# Altium PCB AS800-Temp V1.1.PcbDoc (part 1 of 3)
Units mil, origin at the board's own origin, x right, y up, seen from the top; angles counter-clockwise.
Board outline 4813.18 x 5128.14 mil, 2 copper layers (Top Layer, Bottom Layer); 246 components, 215 nets, 915 pads, 639 vias.
Unrouted connection lines stored in the file: 2.
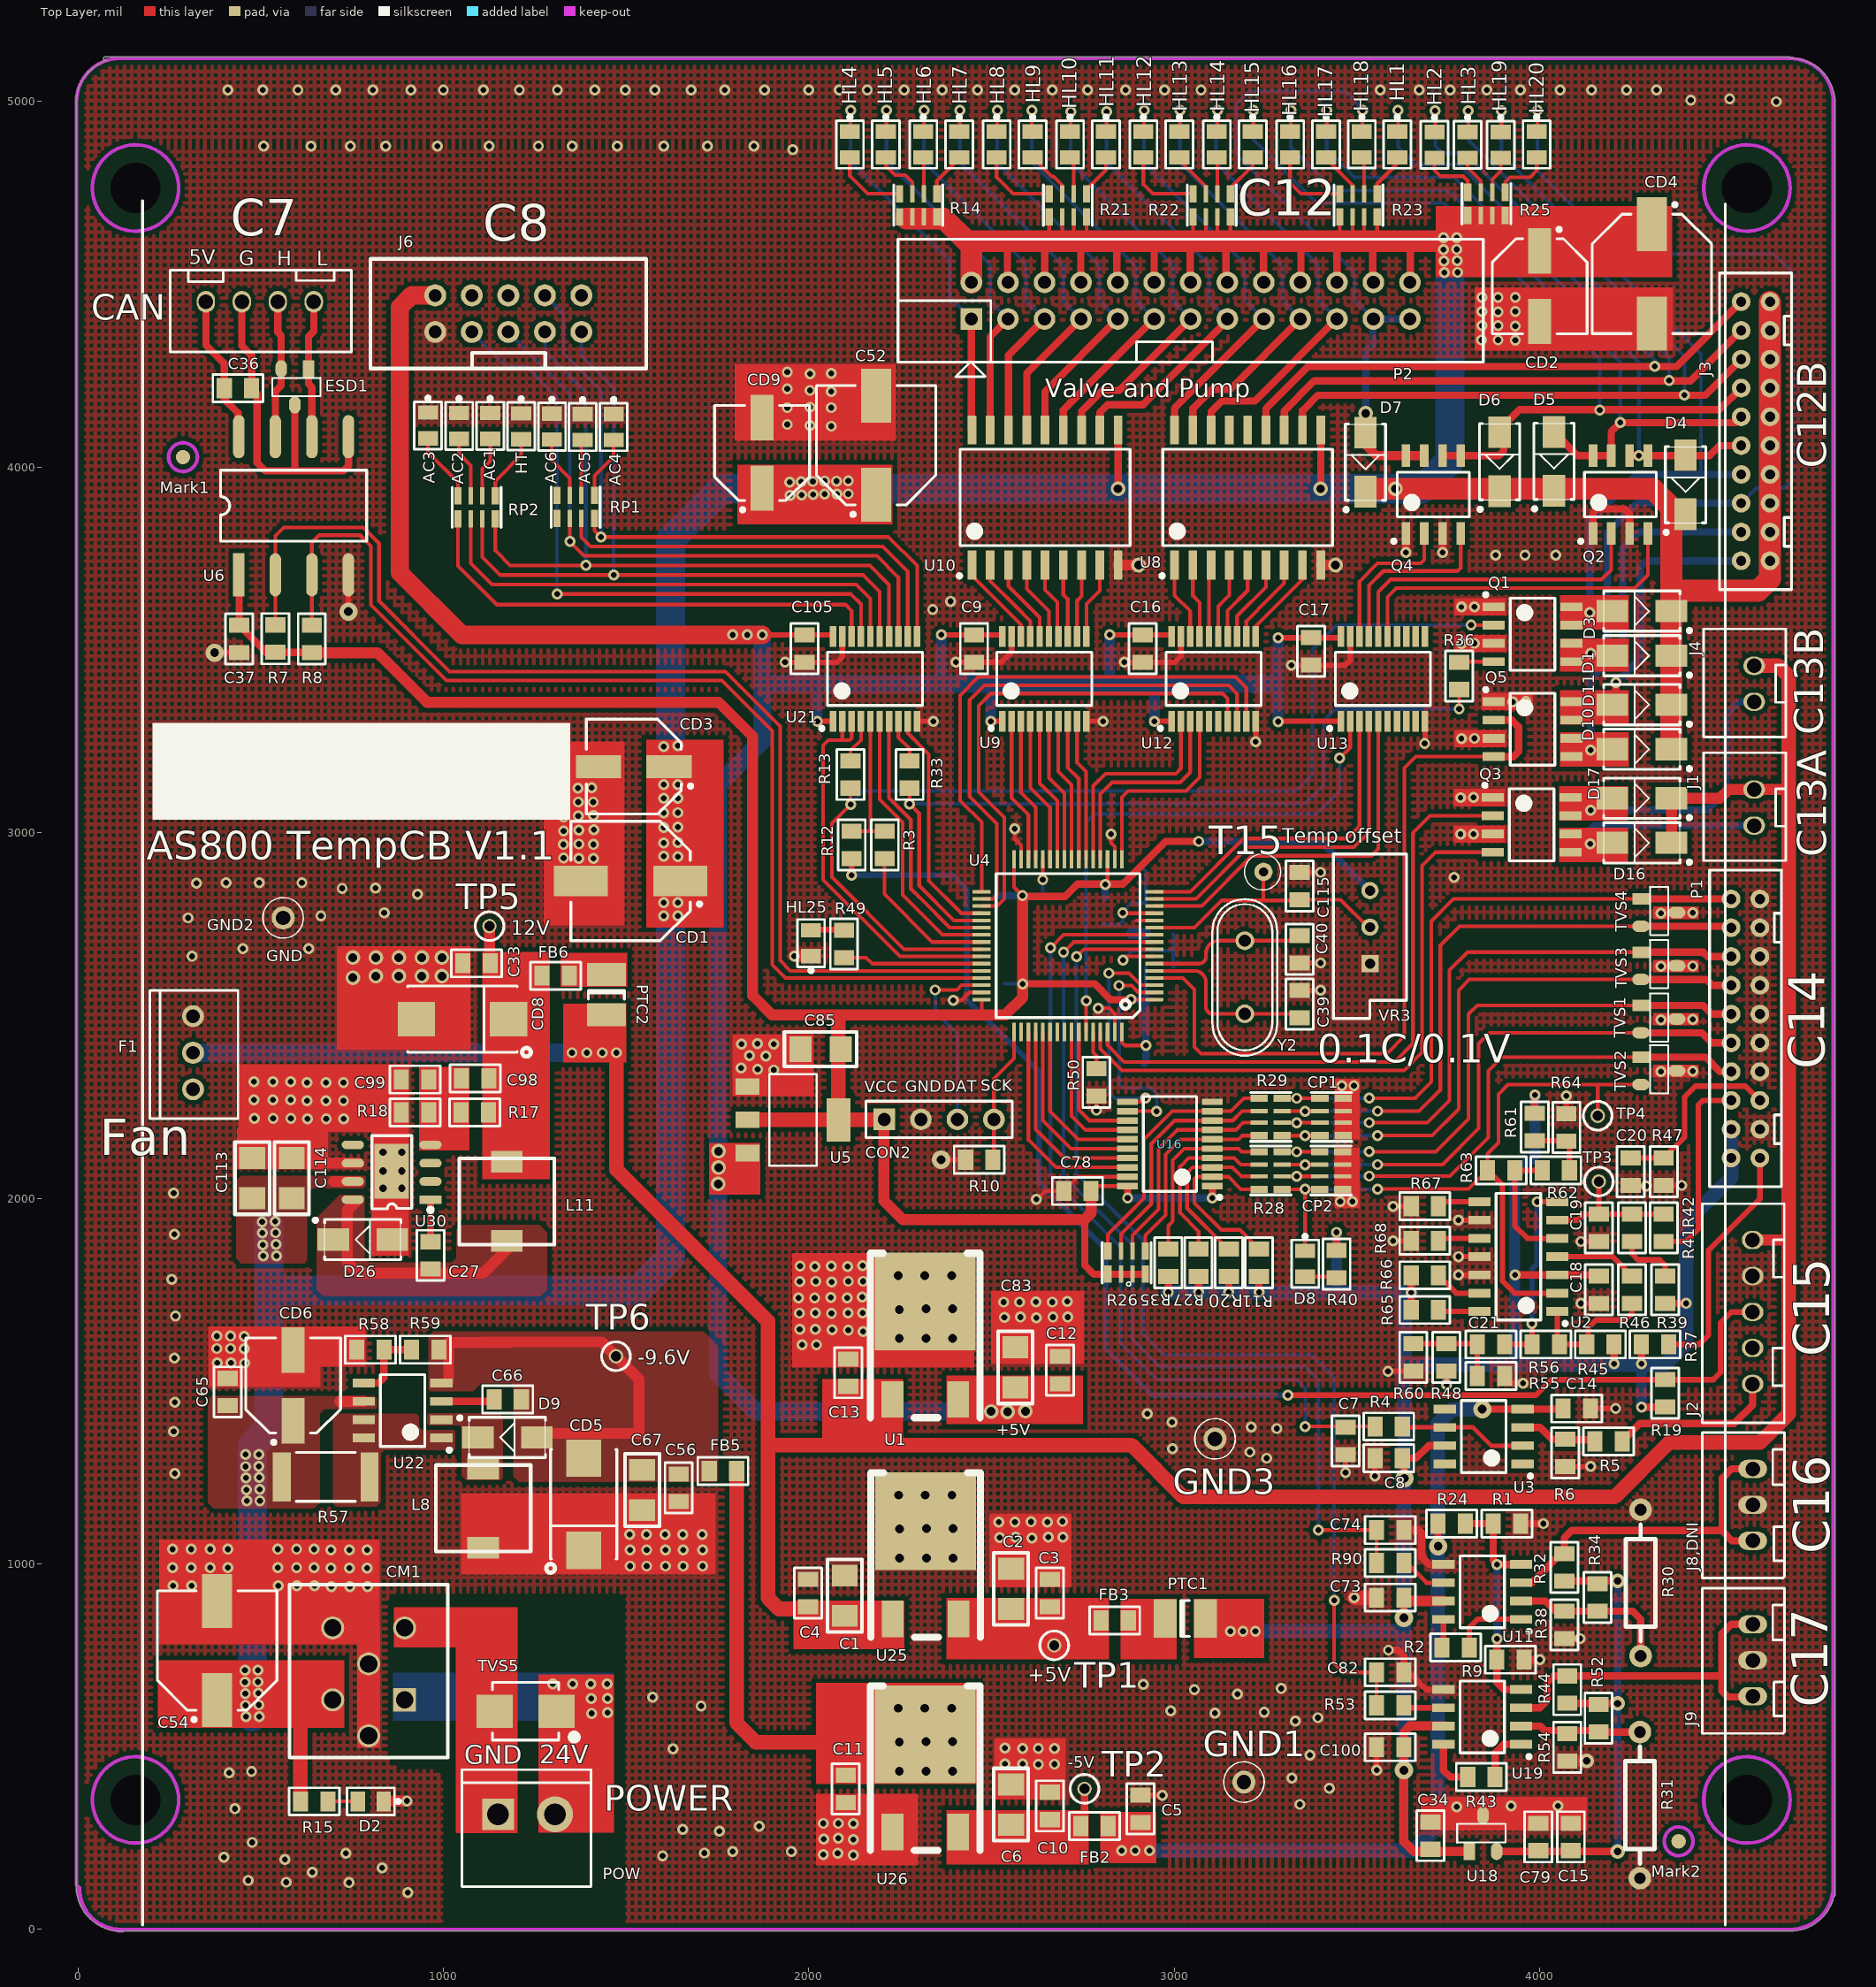
[diagram p0: Top Layer view]
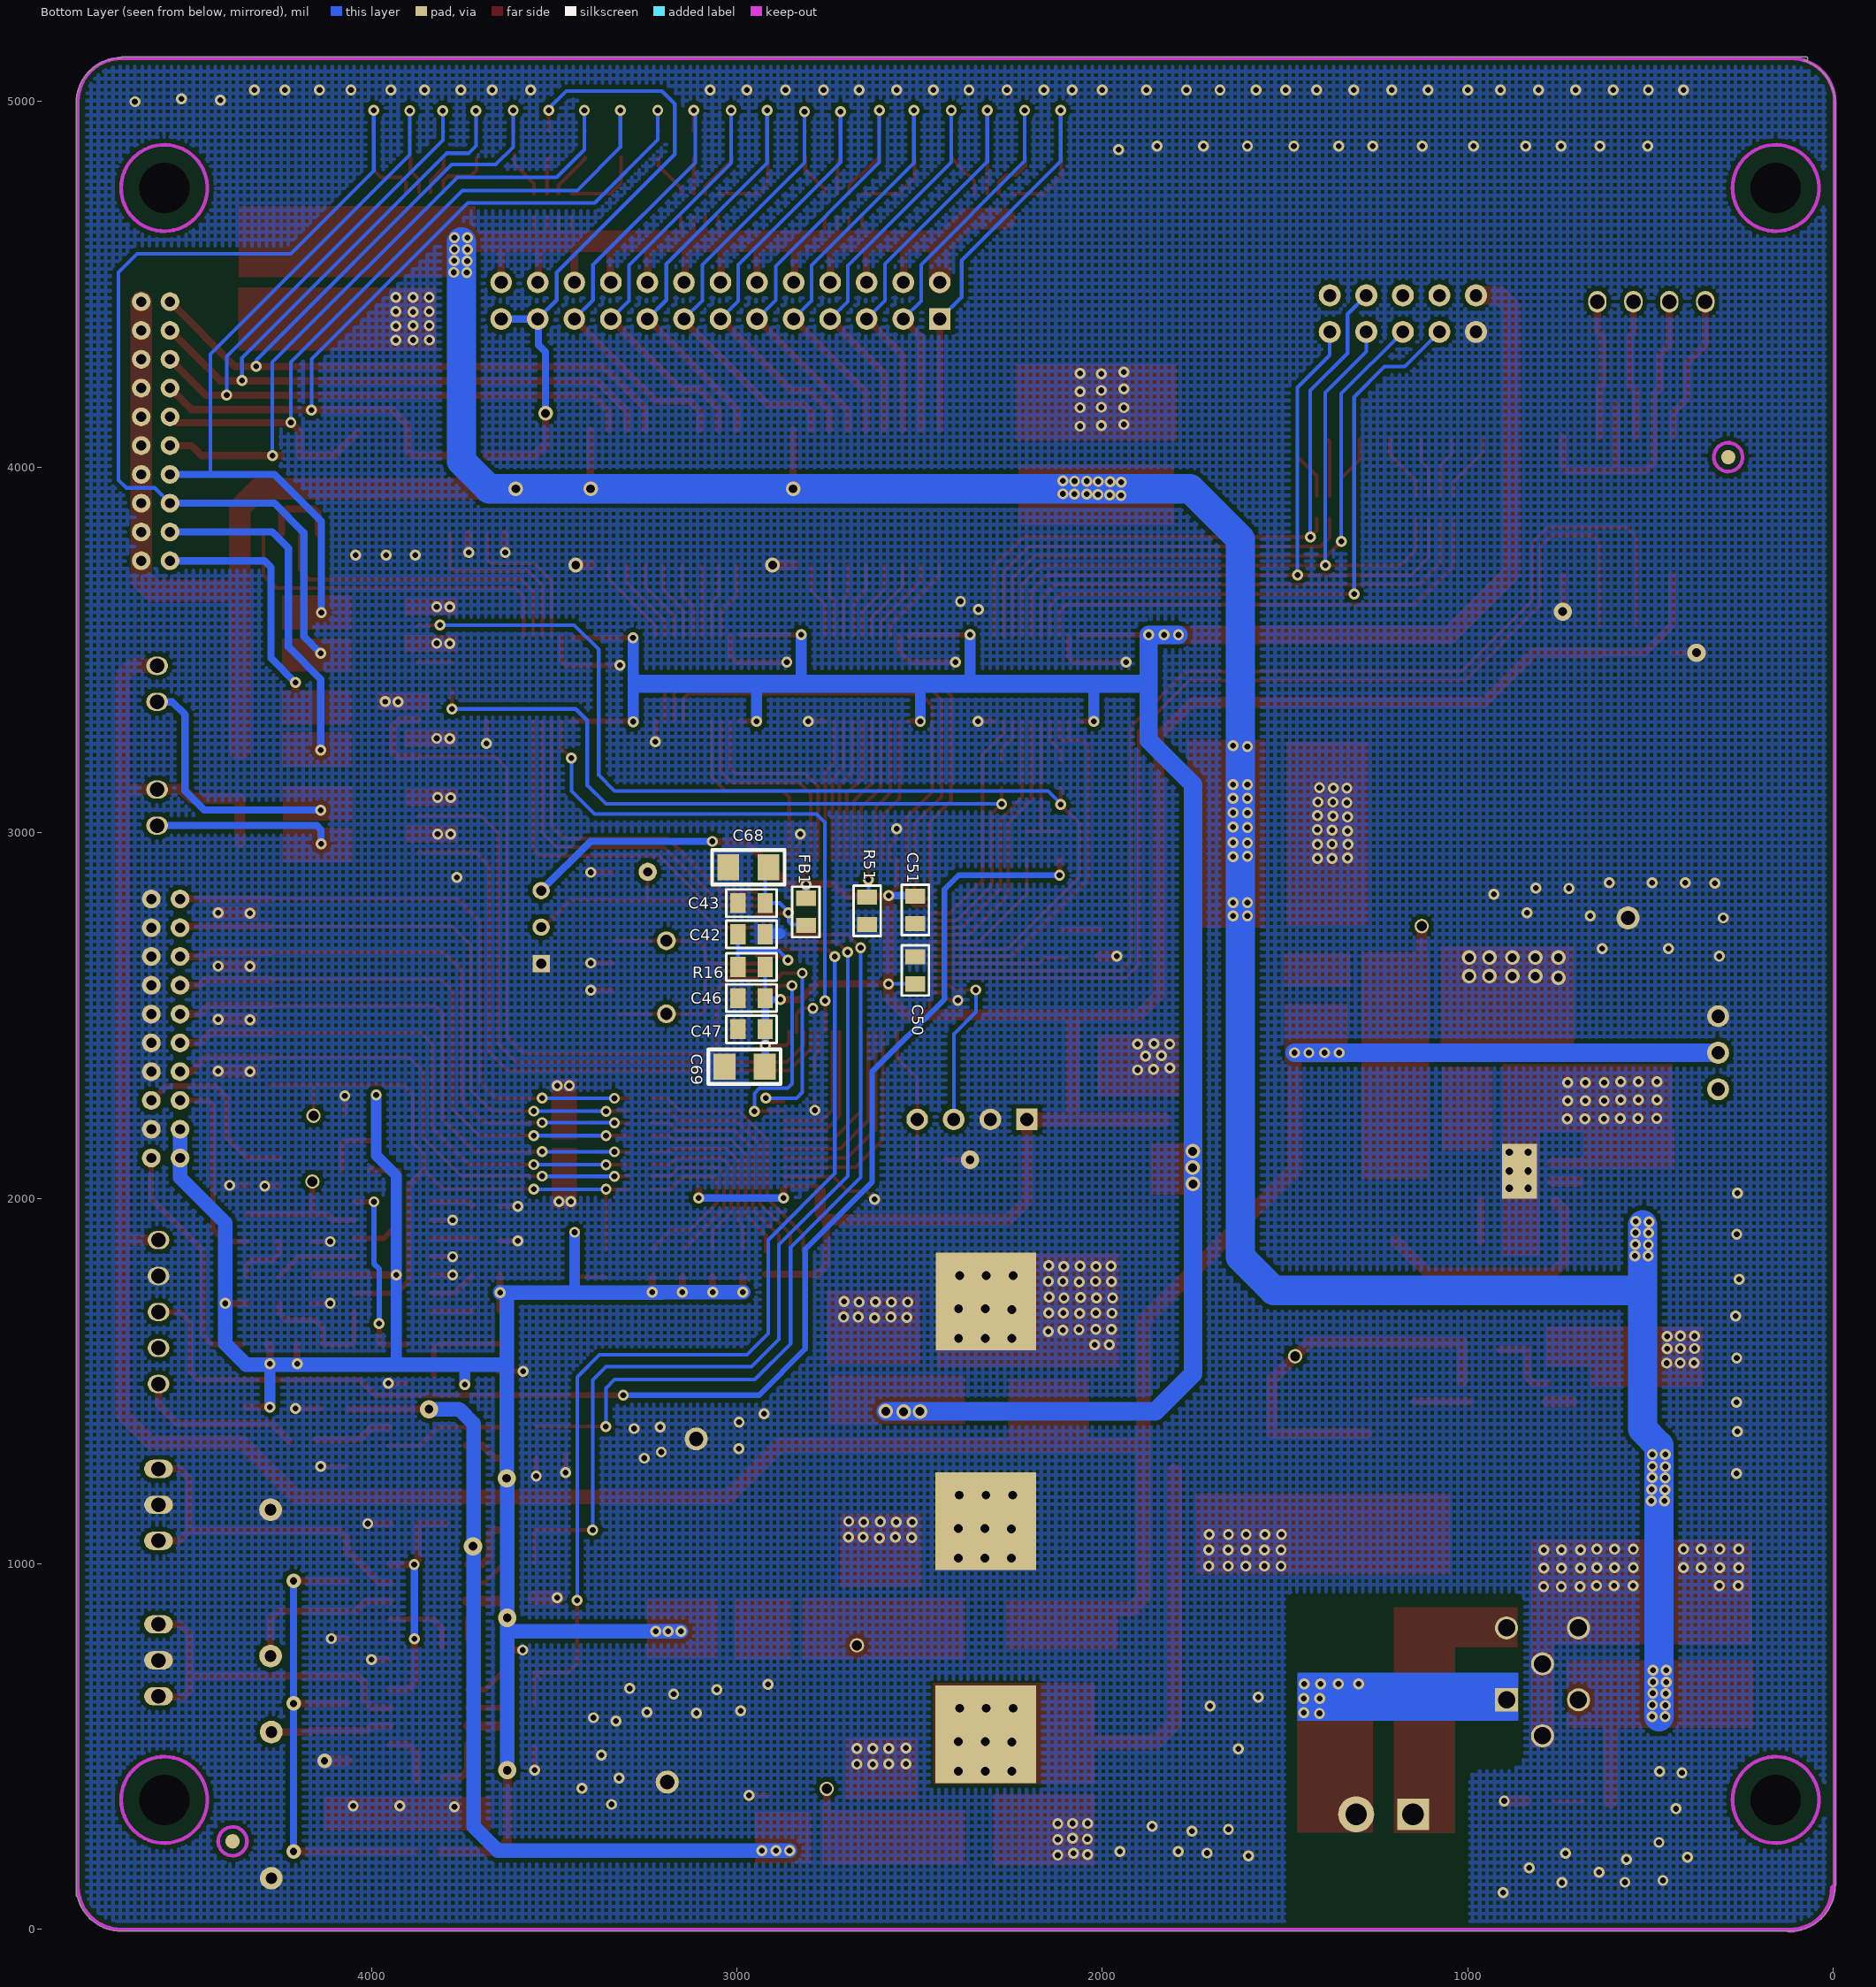
[diagram p1: Bottom Layer view, seen from below]

## Layer stack, top to bottom
Top Layer: signal copper 1.4
Dielectric: dielectric 12.6, FR-4, Dk 4.8
Bottom Layer: signal copper 1.4

## Board outline
-5.02,106.3 -5.02,4996.06 cw(c118.11,4996.06) 79.86,5113.1 74.8,5113.1 cw(c74.8,5118.11) 74.8,5123.13 4681.1,5123.13 cw(c4681.1,5118.11) 4686,5119.18 cw(c4685.04,4996.06) 4808.16,4996.06 4808.16,94.49 cw(c4803.15,94.49) 4804.86,89.77 cw(c4685.04,118.11) 4685.04,-5.01 118.11,-5.01 cw(c118.11,118.11) -4.14,103.47 cw(c0,106.3)

## Design rules (kind name [scope] priority, off if disabled: settings)
Clearance Clearance15 [All] p1 off: gap=15
Clearance Clearance9 [All] p2: gap=6
Clearance Clearance12 [All] p3 off: gap=12
ComponentClearance [All] p1 off: gap=5 collisioncheckmode=3 verticalgap=0 showdistances=TRUE
FabricationTestPointUsage TestPointUsage [All] p1: valid=0 allowmultiple=FALSE
FabricationTestpoint Testpoint [(IsPad And (OnTopLayer Or OnBottomLayer))] p1: side=3 testpointundercomponent=TRUE minsize=40 maxsize=100 preferedsize=60 minholesize=0 maxholesize=40 preferedholesize=32 testpointgrid=1 allowsidetop=TRUE allowsidebottom=TRUE usegrid=TRUE gridtolerance=0.01
HoleSize [All] p1: absolutevalues=TRUE maxlimit=150 minlimit=0 maxpercent=80.000 minpercent=20.000
PolygonConnect [All] p1: connectstyle=Direct reliefconductorwidth=10 reliefentries=4 polygonreliefangle="90 Angle"
RoutingVias [All] p1: holewidth=28 width=50 viastyle="Through Hole" minholewidth=28 minwidth=50 maxholewidth=28 maxwidth=50
SilkscreenOverComponentPads [IsPad] p1: minsilkscreentomaskgap=10
SolderMaskExpansion [All] p1: expansion=4
Width [All] p1: maxlimit=100 minlimit=10 preferedwidth=10 minimp=50.000000 maximp=50.000000 favimp=50.000000
23 further rules are at their usual default settings.

## Classes and differential pairs
component class U_tempContr: AC1 AC2 AC3 AC4 AC5 AC6 C7 C8 C9 C14 C15 C16 C17 C18 C19 C20 C21 C34 C36 C37 C39 C40 C42 C43 C46 C47 C50 C51 C52 C68 C69 C73 C74 C78 C79 C82 C100 C105 C115 C? CAN CD1 CD2 CD3 CD4 CD9 CON2 CP1 CP2 D1 D3 D4 D5 D6 D7 D8 D10 D11 D16 D17 ESD1 FB1 HL1 HL2 HL3 HL4 HL5 HL6 HL7 HL8 HL9 HL10 HL11 HL12 HL13 HL14 HL15 HL16 HL17 HL18 HL19 HL20 HL25 HT J1 J2 J3 J4 J6 J8,DNI J9 P1 P2 Q1 Q2 Q3 Q4 Q5 R1 R2 R3 R4 R5 R6 R7 R8 R9 R10 R11 R12 R13 R14 R16 R19 R20 R21 R22 R23 R24 R25 R26 R27 R28 R29 R30 R31 R32 R33 R34 R35 R36 R37 R38 R39 R40 R41 R42 R43 R44 R45 R46 R47 R48 R49 R50 R51 R52 R53 R54 R55 R56 R60 R61 R62 R63 R64 R65 R66 R67 R68 R90 RP1 RP2 TP3 TP4 TVS1 TVS2 TVS3 TVS4 U2 U3 U4 U6 U8 U9 U10 U11 U12 U13 U16 U18 U19 U21 U? VR3 Y2
component class U_Power: C1 C2 C3 C4 C5 C6 C10 C11 C12 C13 C27 C33 C54 C56 C65 C66 C67 C83 C85 C98 C99 C113 C114 CD5 CD6 CD8 CD? CM1 D2 D9 D26 F1 FB2 FB3 FB5 FB6 L8 L11 POW PTC1 PTC2 R15 R17 R18 R57 R58 R59 TP1 TP2 TP5 TP6 TVS5 U1 U5 U22 U25 U26 U30
component class MB_TOP: GND1 GND2 GND3 Mark1 Mark2 Rx

## Components (designator, comment, footprint, x,y, rotation, side; value= is the part's Value field where it differs from the comment)
AC1 "LED,Red" LED_0805 1128,4113 r270 top
AC2 "LED,Red" LED_0805 1043,4113 r270 top
AC3 "LED,Red" LED_0805 958,4114 r270 top
AC4 "LED,Red" LED_0805 1466,4110 r270 top
AC5 "LED,Red" LED_0805 1381,4110 r270 top
AC6 "LED,Red" LED_0805 1297,4111 r270 top
C1 "10uF/16V" 1206 2098,913 r270 top
C2 "10uF/16V" 1206 2553.32,931.54 r270 top
C3 "100nf/50V" 0805 2659.62,919.72 r90 top
C4 "100nf/50V" 0805 1998,920 r90 top
C5 "100nf/50V" 0805 2907.65,329.86 r90 top
C6 "10uF/16V" 1206 2553.32,341.67 r270 top
C7 "100nf/50V" 0805 3468.58,1336.36 r90 top
C8 "100nf/50V" 0805 3586.69,1289.12 r180 top
C9 "100nf/50V" 0805 2452,3504 r90 top
C10 "100nf/50V" 0805 2659.62,337.73 r90 top
C11 "100nf/50V" 0805 2101,384 r270 top
C12 "100nf/50V" 0805 2687.23,1529.54 r90 top
C13 "100nf/50V" 0805 2108,1523 r90 top
C14 "100nf/50V" 0805 4101,1425 r0 top
C15 "100nf/50V" 0805 4085,253 r270 top
C16 "100nf/50V" 0805 2913.39,3503.94 r90 top
C17 "100nf/50V" 0805 3374.02,3496.06 r90 top
C18 "100nf/50V" 0805 4161.98,1749.91 r270 top
C19 "1nf/50V" 0805 4161.98,1919.2 r270 top
C20 "10nf/50V" 0805 4248.59,2072.74 r270 top
C21 "100nf/50V" 0805 3866.7,1513.69 r0 top
C27 "10nF/50V" 0805 964.76,1843.72 r270 top
C33 "100nf/50V" 0805 1090.74,2642.94 r180 top
C34 "100nf/50V" 0805 3700.79,256.59 r270 top
C36 "100nf/50V" 0805 438,4216 r180 top
C37 "100nf/50V" 0805 441,3530 r90 top
C39 "22pf/50V" 0805 3342.52,2531.5 r270 top
C40 "22pf/50V" 0805 3342.52,2681.1 r90 top
C42 "100nf/50V" 0805 2959.72,2722.64 r180 bottom
C43 "100nf/50V" 0805 2959.72,2807.64 r0 bottom
C46 "100nf/50V" 0805 2959.72,2547.64 r0 bottom
C47 "100nf/50V" 0805 2959.72,2462.64 r0 bottom
C50 "100nf/50V" 0805 2511.92,2623.64 r90 bottom
C51 "100nf/50V" 0805 2511.92,2788.64 r270 bottom
C52 "220uf/35V" CX8*10.5 2184,4060 r90 top
C54 "220uf/35V" CX8*10.5 381,763 r90 top
C56 "100nf/50V" 0805 1644,1208 r270 top
C65 "100nf/50V" 0805 410,1470 r90 top
C66 "1500pf/50V" 0805 1176,1450 r0 top
C67 "10uF/16V" 1206 1544,1202 r90 top
C68 "10uF/16V" 1206 2968.5,2905.51 r0 bottom
C69 "10uF/16V" 1206 2979,2360 r180 bottom
C73 "100nf/50V" 0805 3591.08,907.49 r180 top
C74 "100nf/50V" 0805 3591.08,1092.49 r180 top
C78 "100nf/50V" 0805 2735,2020 r0 top
C79 "100nf/50V" 0805 3996,253 r270 top
C82 "100nf/50V" 0805 3591.08,703.12 r180 top
C83 "4.7uF/50V" 1206 2565.19,1537.41 r270 top
C85 "4.7uF/50V" 1206 2032,2408 r0 top
C98 "1500pF/50V" 0805 1086.8,2327.98 r0 top
C99 "150pF/50V" 0805 922.73,2324.99 r0 top
C100 "100nf/50V" 0805 3590.96,498.39 r180 top
C105 "100nf/50V" 0805 1988,3504 r90 top
C113 "4.7uF/50V" 1206 477,2055 r270 top
C114 "4.7uF/50V" 1206 585,2055 r270 top
C115 "100nf/50V" 0805 3342.52,2854.33 r90 top
CAN "XH2.54-4P" XH2.5-4P 350.15,4452.76 r0 top
CD1 "220uf/35V" CX8*10.5 1512,2868 r180 top
CD2 "100uf/35V" CX6.3*5.4 4000,4495 r270 top
CD3 "100uf/35V" CX6.3*5.4 1521,3181 r180 top
CD4 "220uf/35V" CX8*10.5 4307,4529 r270 top
CD5 "100uf/16V" 7343D 1384,1163 r90 top
CD6 "100uf/35V" CX6.3*5.4 589,1488 r90 top
CD8 "100uf/16V" 7343D 1052.17,2490.19 r180 top
CD9 "100uf/35V" CX6.3*5.4 1872,4039 r90 top
CM1 "BNX002-01" BNX-002-01 894,628 r270 top
CON2 "Header 4" HDR1X4 2206.56,2215.67 r0 top
CP1 "100nF/50V,±10%" 8P4R_0603 3430,2222.43 r180 top
CP2 "100nF/50V,±10%" 8P4R_0603 3429,2076 r180 top
D1 "1N4007(M7)" SMA(AK) 4279.53,3484.25 r180 top
D2 "LED,Red" LED_0805 801.4,350 r180 top
D3 "1N4007(M7)" SMA(AK) 4279.53,3606.3 r180 top
D4 "B340A" SMA(AK) 4399,3952 r90 top
D5 "B340A" SMA(AK) 4039,4016 r90 top
D6 "B340A" SMA(AK) 3890,4015 r90 top
D7 "B340A" SMA(AK) 3523,4014 r90 top
D8 "LED" LED_0805 3358,1821 r270 top
D9 "B340A" SMA 1175,1346 r0 top
D10 "1N4007(M7)" SMA(AK) 4279.53,3228.35 r180 top
D11 "1N4007(M7)" SMA(AK) 4279.53,3350.39 r180 top
D16 "1N4007(M7)" SMA(AK) 4279.53,2972.44 r180 top
D17 "1N4007(M7)" SMA(AK) 4279.53,3094.49 r180 top
D26 "B340A" SMA 779.72,1887.03 r0 top
ESD1 "PESD1CAN" SOT233 631,4269 r270 top
F1 "KF2510-3P" KF2510-3 315.01,2498.16 r270 top
FB1 "220 ohm/100MHZ" 0805 2811.02,2783.46 r270 bottom
FB2 "220 ohm/100MHZ" 0805 2781.67,282.61 r0 top
FB3 "220 ohm/100MHZ" 0805 2836.79,844.92 r0 top
FB5 "220 ohm/100MHZ" 0805 1765,1254 r0 top
FB6 "220 ohm/100MHZ" 0805 1307,2609 r0 top
GND1 "GND Point" Gnd_Point 3190,403 r0 top
GND2 "GND Point" Gnd_Point 561,2767 r0 top
GND3 "GND Point" Gnd_Point 3112,1342 r180 top
HL1 "LED,Red" LED_0805 3610.24,4882.96 r270 top
HL2 "LED,Red" LED_0805 3712.09,4881.89 r270 top
HL3 "LED,Red" LED_0805 3802.65,4881.89 r270 top
HL4 "LED,Red" LED_0805 2112.26,4882.96 r270 top
HL5 "LED,Red" LED_0805 2210.68,4882.96 r270 top
HL6 "LED,Red" LED_0805 2313.05,4882.96 r270 top
HL7 "LED,Red" LED_0805 2411.47,4882.96 r270 top
HL8 "LED,Red" LED_0805 2513.83,4882.96 r270 top
HL9 "LED,Red" LED_0805 2612.26,4882.96 r270 top
HL10 "LED,Red" LED_0805 2714.62,4882.96 r270 top
HL11 "LED,Red" LED_0805 2813.05,4882.96 r270 top
HL12 "LED,Red" LED_0805 2915.41,4882.96 r270 top
HL13 "LED,Red" LED_0805 3013.83,4882.96 r270 top
HL14 "LED,Red" LED_0805 3116.19,4882.96 r270 top
HL15 "LED,Red" LED_0805 3214.62,4882.96 r270 top
HL16 "LED,Red" LED_0805 3316.98,4882.96 r270 top
HL17 "LED,Red" LED_0805 3415.41,4882.96 r270 top
HL18 "LED,Red" LED_0805 3513,4883 r270 top
HL19 "LED,Red" LED_0805 3893.2,4881.89 r270 top
HL20 "LED,Red" LED_0805 3991.62,4882.96 r270 top
HL25 "LED,Red" LED_0805 2005.74,2697.99 r90 top
HT "LED,Red" LED_0805 1213,4112 r270 top
J1 "XH2.54-2P" XH2.5-2P 4586.61,3118.11 r270 top
J2 "XH2.5-5P" XH2.5-5P 4582.55,1885.83 r270 top
J3 "PHD-20" PHD-20 4629.92,4452.76 r90 top
J4 "XH2.54-2P" XH2.5-2P 4586.61,3456.69 r270 top
J6 "Header 5X2" DC3-10 1377.71,4370.08 r180 top
J8,DNI "XH2.54-3P" XH2.5-3P 4582.68,1259.84 r270 top
J9 "XH2.54-3P" XH2.5-3P 4582.68,834.65 r270 top
L8 "68uH" "INDUCTOR 6*6" 1109,1044 r90 top
L11 "68uH" "INDUCTOR 6*6" 1173.42,1883.09 r90 top
Mark1 "Mark Point" "MARK 3MM" 287.4,4027.56 r180 top
Mark2 "Mark Point" "MARK 3MM" 4380,241 r90 top
P1 "PHD-20" PHD-20 4602.36,2818.9 r90 top
P2 "DC3 13X2" DC3-2X13 2444.88,4405.51 r0 top
POW "VH3.96-2" VH3.96-2 1149.61,314.96 r0 top
PTC1 "PTCC" 1210 3029.7,850.61 r0 top
PTC2 "PTCC" 1210 1446,2557 r270 top
Q1 "NTM5848NL" SOIC8 3874.02,3618.11 r0 top
Q2 "NTM5848NL" SOIC8 4145.67,3818.9 r90 top
Q3 "FDS9945/SOP" SOIC8 3871.67,3096.61 r0 top
Q4 "NTM5848NL" SOIC8 3633.86,3818.9 r90 top
Q5 "NTM5848NL" SOIC8 3874.02,3358.27 r0 top
R1 "0R,1%" 0805 3910,1110 r180 top
R2 "2K,0.1%" 0805 3770,771 r0 top
R3 "0R,1%,DNI" 0805 2207.72,2966.33 r90 top
R4 "1K,1%" 0805 3586.69,1375.73 r0 top
R5 "2K,0.1%" 0805 4188.06,1335.24 r180 top
R6 "2K,0.1%" 0805 4070,1303.6 r270 top
R7 "4.7K,1%" 0805 540,3531 r270 top
R8 "4.7K,1%" 0805 640,3530 r270 top
R9 "0R,1%" 0805 3920,738 r180 top
R10 "10K,1%" 0805 2466.4,2105.43 r180 top
R11 "10K,5%" 0805 3231.72,1823.8 r270 top
R12 "0R,1%" 0805 2117.17,2966.33 r90 top
R13 "0R,1%,DNI" 0805 2114.17,3159.45 r90 top
R14 "10K,1%" 8P4R_0603 2299.21,4716.54 r90 top
R15 "10K,1%" 0805 646.4,350 r0 top
R16 "100K,1%" 0805 2959.72,2632.64 r180 bottom
R17 "10K,1%" 0805 1085.6,2234.99 r0 top
R18 "1.2K,1%" 0805 922.73,2234.99 r0 top
R19 "1K,1%" 0805 4343.08,1466.44 r90 top
R20 "10K,5%" 0805 3149.05,1823.8 r270 top
R21 "10K,1%" 8P4R_0603 2708.66,4716.54 r90 top
R22 "10K,1%" 8P4R_0603 3102.36,4716.54 r90 top
R23 "10K,1%" 8P4R_0603 3503.94,4716.54 r90 top
R24 "0R,1%,DNI" 0805 3759,1110 r0 top
R25 "10K,1%" 8P4R_0603 3854.33,4720.47 r90 top
R26 "10K,1%" 8P4R_0603 2869.52,1823.8 r270 top
R27 "10K,5%" 0805 3066.37,1823.8 r270 top
R28 "2K,1%" 8P4R_0603 3264,2076 r180 top
R29 "2K,1%" 8P4R_0603 3264.03,2222.43 r180 top
R30 "100R,0.1%" AXIAL-0.4 4276,1148 r270 top
R31 "100R,0.1%" AXIAL-0.4 4274,140 r90 top
R32 "2K,0.1%" 0805 4067.34,990.52 r90 top
R33 "0R,1%,DNI" 0805 2275.59,3159.45 r90 top
R34 "2K,0.1%" 0805 4157.89,907.84 r270 top
R35 "10K,5%" 0805 2983.69,1823.8 r270 top
R36 "0R,1%" 0805 3779.53,3429.13 r90 top
R37 "0R,1%,DNI" 0805 4315.52,1600.3 r180 top
R38 "100R,0.1%,DNI" 0805 4067.34,833.04 r270 top
R39 "900K,5%" 0805 4343.08,1749.91 r90 top
R40 "10K,5%" 0805 3444,1820 r90 top
R41 "820K,5%" 0805 4252.53,1919.2 r90 top
R42 "10K,5%" 0805 4339.14,1919.2 r270 top
R43 "2K,0.1%" 0805 3840.41,417.21 r0 top
R44 "2K,0.1%" 0805 4075.21,655.87 r90 top
R45 "2.2K,5%" 0805 4165.92,1600.3 r0 top
R46 "470R,5%" 0805 4252.53,1749.91 r90 top
R47 "47R,5%" 0805 4339.14,2072.74 r270 top
R48 "330R,5%" 0805 3744.66,1564.87 r90 top
R49 "4.7K,1%" 0805 2096.29,2695.8 r270 top
R50 "10K,1%" 0805 2787,2317 r270 top
R51 "10K,1%" 0805 2643.72,2786.74 r270 bottom
R52 "2K,0.1%" 0805 4161,578 r270 top
R53 "1K,1%" 0805 3591.08,612.57 r0 top
R54 "100R,0.1%,DNI" 0805 4075.21,498.39 r270 top
R55 "2.2K,5%" 0805 3866.7,1600.3 r0 top
R56 "22K,5%" 0805 4016.31,1600.3 r0 top
R57 "1Ω,1%" 2512 678,1238 r180 top
R58 "10K,1%" 0805 800,1586 r180 top
R59 "1.5K,1%" 0805 950,1586 r180 top
R60 "470R,5%" 0805 3654.1,1564.87 r270 top
R61 "330R,5%" 0805 3986,2195 r270 top
R62 "2.2K,5%" 0805 4043.87,2076.68 r180 top
R63 "22K,5%" 0805 3894.26,2076.68 r180 top
R64 "470R,5%" 0805 4073,2194 r90 top
R65 "2.2K,5%" 0805 3685.6,1694.79 r180 top
R66 "2.2K,5%" 0805 3685.6,1789.28 r180 top
R67 "470R,5%" 0805 3685.6,1978.25 r180 top
R68 "470R,5%" 0805 3685.6,1883.77 r180 top
R90 "1K,1%" 0805 3591.08,1002.49 r0 top
RP1 "10K,1%" 8P4R_0603 1362,3891 r270 top
RP2 "10K,1%" 8P4R_0603 1091,3890 r270 top
TP1 "TP" TP1 2671.43,777.46 r90 top
TP2 "TP" TP1 2754.11,384.98 r90 top
TP3 "TP" TP1 4161.98,2046 r0 top
TP4 "TP" TP1 4159,2226 r0 top
TP5 "TP" TP1 1126,2745 r90 top
TP6 "TP" TP1 1472.44,1567.57 r270 top
TVS1 "Wurth 824022" SOT233 4276.65,2527.66 r0 top
TVS2 "Wurth 824022" SOT233 4276.65,2385.93 r0 top
TVS3 "Wurth 824022" SOT233 4276.65,2673.33 r0 top
TVS4 "Wurth 824022,DNI" SOT233 4276.65,2819 r0 top
TVS5 "'SMAJ28ACA" SMB 1225,597 r0 top
U1 "L78M05" TO-252 2228.53,1449.85 r0 top
U2 "LM339DT" SOIC14 3941.51,1840.46 r180 top
U3 "OPA177GS,DNI" SOIC8 3952.83,1273.37 r180 top
U4 "STM32F103RBT6" LQFP64 2945.39,2543.58 r180 top
U5 "AMS1117-3.3" SOT223S 1831.71,2305.67 r270 top
U6 "ISO1050" SOP8-DUB 440.19,3705.56 r90 top
U8 "ULN2803AFWG" SOIC18-DW 3200.79,3917.32 r90 top
U9 "74HCT245" TSSOP20 2644.36,3421.26 r90 top
U10 "ULN2803AFWG" SOIC18-DW 2646.42,3917.32 r90 top
U11 "AD623ARZ,DNI" SOIC8 3948.95,848.43 r180 top
U12 "74HCT245" TSSOP20 3107.61,3421.26 r90 top
U13 "74HCT245" TSSOP20 3570.87,3421.26 r90 top
U16 "74HCT245" TSSOP20 2988.19,2148.62 r180 top
U18 "REF3040" SOT233 3807.09,213.28 r90 top
U19 "AD623ARZ" SOIC8 3948.95,506.27 r180 top
U21 "74HCT245" TSSOP20 2181.1,3421.26 r90 top
U22 "MC33063A" SOIC8 994.61,1344.43 r180 top
U25 "L78M05" TO-252 2229.55,849.03 r0 top
U26 "L79M05" TO-252 2228.58,266.02 r0 top
U30 "TPS5430DDA" S0IC8-DDA 964.81,1996.17 r180 top
VR3 "10K POT" VR3296 3535.43,2641.73 r270 top
Y2 "8Mhz" HC-49S 3192.91,2704.72 r90 top

## Footprints (in the part's own frame and the unit in brackets; to place one, negate y for a bottom-side part, rotate by r counter-clockwise, add the part's x,y. Pads: shape width x height; smd on the part's side, far side on the other; paste and mask are expansions set on the pad)
8P4R_0603 [mm]
  rect 1.2x0.5 smd: 1(-0.8,1.3) 2(0.8,1.3) 7(-0.8,-1.3) 8(0.8,-1.3)
  rect 1.2x0.3 smd: 3(-0.8,0.4) 4(0.8,0.4) 5(-0.8,-0.4) 6(0.8,-0.4)
  silkscreen extent -1.4,-1.7 1.4,1.7
0805 [mm]
  rect 1.05x1.4 smd: 1(-0.95,0) 2(0.95,0)
  silkscreen extent -1.75,-0.95 1.75,0.95
1206 [mil]
  rect 60x70.87 smd: 1(55,0) 2(-55,0)
  silkscreen extent -99,-47 99,47
1210 [mm] "Chip Capacitor; Body 3.2 x 2.5 mm (LxW typ)"
  rect 1.6x2.7 smd: 1(-1.4,0) 2(1.4,0)
  silkscreen extent -0.3,-1.25 0.3,1.25
2512 [mm]
  rect 1.25x3.4 smd: 1(-3.05,0) 2(3.05,0)
  silkscreen extent -2.05,-1.7 2.05,1.7
7343D [mm] "Capacitor, SM Tantalum; Body 7.3 x 4.3 mm (LxW typ)"
  rect 2.6x2.4 smd: 1(-3.2,0) 2(3.2,0)
  silkscreen extent -4.75,-2.3 3.8,2.6
AXIAL-0.4 [mil]
  round 62 hole 32: 1(0,0) 2(400,0)
  silkscreen extent 40,-40 360,40
BNX-002-01 [mm]
  rect 1.6x1.6 hole 1.2: B(0,0)
  round 1.6 hole 1.2: CB(0,-5) CG(-5,-5) CG(-2.5,-2.5) CG(2.5,-2.5) PSG(-5,0)
  silkscreen extent -8,-8 4,3
CX6.3*5.4 [mm]
  rect 3.15x1.6 smd: 1(-2.45,0) 2(2.45,0)
  silkscreen extent -4.07,-3.3 3.3,3.3
CX8*10.5 [mm]
  rect 3.75x2.1 smd: 1(-3.45,0) 2(3.45,0)
  silkscreen extent -4.92,-4.15 4.15,4.15
DC3-2X13 [mm] "IDC2*13,简易羊角座，母座"
  rect 1.5x1.5 hole 0.9: 1(0,0)
  round 1.5 hole 0.9: 2(0,2.54) 3(2.54,0) 4(2.54,2.54) 5(5.08,0) 6(5.08,2.54) 7(7.62,0) 8(7.62,2.54) 9(10.16,0) 10(10.16,2.54) 11(12.7,0) 12(12.7,2.54) 13(15.24,0) 14(15.24,2.54) 15(17.78,0) 16(17.78,2.54) 17(20.32,0) 18(20.32,2.54) 19(22.86,0) 20(22.86,2.54) 21(25.4,0) 22(25.4,2.54) 23(27.94,0) 24(27.94,2.54) 25(30.48,0) 26(30.48,2.54)
  silkscreen extent -5.1,-4.01 35.58,5.54
DC3-10 [mil]
  round 60 hole 35: 1(0,0) 2(0,-100) 3(100,0) 4(100,-100) 5(200,0) 6(200,-100) 7(300,0) 8(300,-100) 9(400,0) 10(400,-100)
  silkscreen extent -177,-200 577,100
Gnd_Point [mm]
  round 1.6 hole 1: 1(0.015,0.004)
  silkscreen extent -1.39,-1.4 1.42,1.41
HC-49S [mm]
  round 1.3 hole 0.85: 1(0,0) 2(-5.08,0)
  silkscreen extent -7.99,-2.25 2.88,2.25
HDR1X4 [mm] "Connector; Header; 4 Position"
  rect 1.5x1.5 hole 0.9: 1(0,0)
  round 1.5 hole 0.9: 2(2.54,0) 3(5.08,0) 4(7.62,0)
  silkscreen extent -1.27,-1.27 8.89,1.27
"INDUCTOR 6*6" [mm]
  rect 1.5x2.2 smd: 1(0,0) 2(5.5,0)
  silkscreen extent -0.25,-3.3 5.75,3.3
KF2510-3 [mil]
  round 60 hole 37: 1(0,0) 2(100,0) 3(200,0)
  silkscreen extent -71,-118 280,123
LED_0805 [mm]
  rect 1x1.4 smd: A(0.9,0) K(-0.9,0)
  silkscreen extent -2.02,-0.95 1.65,0.95
LQFP64 [mm]
  oval 1.27x0.254 smd: 1(0,0)
  rect 1.27x0.254 smd: 2(0,-0.5) 3(0,-1) 4(0,-1.5) 5(0,-2) 6(0,-2.5) 7(0,-3) 8(0,-3.5) 9(0,-4) 10(0,-4.5) 11(0,-5) 12(0,-5.5) 13(0,-6) 14(0,-6.5) 15(0,-7) 16(0,-7.5) 33(12,-7.5) 34(12,-7) 35(12,-6.5) 36(12,-6) 37(12,-5.5) 38(12,-5) 39(12,-4.5) 40(12,-4) 41(12,-3.5) 42(12,-3) 43(12,-2.5) 44(12,-2) 45(12,-1.5) 46(12,-1) 47(12,-0.5) 48(12,0)
  rect 0.254x1.27 smd: 17(2.25,-9.75) 18(2.75,-9.75) 19(3.25,-9.75) 20(3.75,-9.75) 21(4.25,-9.75) 22(4.75,-9.75) 23(5.25,-9.75) 24(5.75,-9.75) 25(6.25,-9.75) 26(6.75,-9.75) 27(7.25,-9.75) 28(7.75,-9.75) 29(8.25,-9.75) 30(8.75,-9.75) 31(9.25,-9.75) 32(9.75,-9.75) 49(9.75,2.25) 50(9.25,2.25) 51(8.75,2.25) 52(8.25,2.25) 53(7.75,2.25) 54(7.25,2.25) 55(6.75,2.25) 56(6.25,2.25) 57(5.75,2.25) 58(5.25,2.25) 59(4.75,2.25) 60(4.25,2.25) 61(3.75,2.25) 62(3.25,2.25) 63(2.75,2.25) 64(2.25,2.25)
  silkscreen extent 1,-8.75 11,1.25
"MARK 3MM" [mm]
  round 1 all layers, no hole mask+1: 0(0,0)
PHD-20 [mm]
  round 1.3 hole 0.7: 1(0,0) 2(0,2) 3(-2,0) 4(-2,2) 5(-4,0) 6(-4,2) 7(-6,0) 8(-6,2) 9(-8,0) 10(-8,2) 11(-10,0) 12(-10,2) 13(-12,0) 14(-12,2) 15(-14,0) 16(-14,2) 17(-16,0) 18(-16,2) 19(-18,0) 20(-18,2)
  silkscreen extent -20,-1.5 2,3.5
S0IC8-DDA [mm]
  rect 1.55x0.6 smd: 1(0,0)
  oval 1.55x0.6 smd: 2(0,-1.27) 3(0,-2.54) 4(0,-3.81) 5(5.4,-3.81) 6(5.4,-2.54) 7(5.4,-1.27) 8(5.4,0)
  rect 2.4x3.8 all layers, no hole: 9(2.7,-1.981)
  silkscreen extent -0.14,-4.44 4.07,0.84
SMA [mm]
  rect 2.2x1.55 smd: A(2.05,0) K(-2.05,0)
  silkscreen extent -3.42,-1.4 2.65,1.47
SMA(AK) [mm]
  rect 2.2x1.55 smd: A(2.05,0) K(-2.05,0)
  silkscreen extent -3.43,-1.4 2.65,1.47
SMB [mm]
  rect 2.5x2.3 smd: A(-2.15,0) K(2.15,0)
  silkscreen extent -2.3,-2.02 3.6,2
SOIC8 [mm]
  rect 1.55x0.6 smd: 1(0,0) 2(0,-1.27) 3(0,-2.54) 4(0,-3.81) 5(5.4,-3.81) 6(5.4,-2.54) 7(5.4,-1.27) 8(5.4,0)
  silkscreen extent -0.67,-4.41 4.25,0.97
SOIC14 [mm]
  rect 1.55x0.6 smd: 1(-2.7,3.81) 2(-2.7,2.54) 3(-2.7,1.27) 4(-2.7,0) 5(-2.7,-1.27) 6(-2.7,-2.54) 7(-2.7,-3.81) 8(2.7,-3.81) 9(2.7,-2.54) 10(2.7,-1.27) 11(2.7,0) 12(2.7,1.27) 13(2.7,2.54) 14(2.7,3.81)
  silkscreen extent -3.38,-4.4 1.55,4.77
SOIC18-DW [mm]
  rect 2x0.6 smd: 1(-4.7,5.08) 2(-4.7,3.81) 3(-4.7,2.54) 4(-4.7,1.27) 5(-4.7,0) 6(-4.7,-1.27) 7(-4.7,-2.54) 8(-4.7,-3.81) 9(-4.7,-5.08) 10(4.7,-5.08) 11(4.7,-3.81) 12(4.7,-2.54) 13(4.7,-1.27) 14(4.7,0) 15(4.7,1.27) 16(4.7,2.54) 17(4.7,3.81) 18(4.7,5.08)
  silkscreen extent -5.57,-5.9 3.35,6.07
SOP8-DUB [mm]
  rect 3x0.8 smd: 1(0,0)
  oval 3x0.8 smd: 2(0,-2.54) 3(0,-5.08) 4(0,-7.62) 5(9.6,-7.62) 6(9.6,-5.08) 7(9.6,-2.54) 8(9.6,0)
  silkscreen extent 2.33,-8.89 7.26,1.27
SOT223S [mil]
  rect 45x65 smd: 1(182,0) 2(0,0) 3(91,0)
  rect 118x65 smd: 4(91,250)
  silkscreen extent -34,60 216,190
SOT233 [mm]
  rect 1.2x0.8 smd: 1(0,0)
  oval 1.2x0.8 smd: 2(0,-1.9) 3(2.5,-0.95)
  silkscreen extent 0.61,-2.51 1.91,0.84
TO-252 [mil]
  rect 60x100 smd: 1(0,0) 3(180,0)
  rect 275.59x267.72 all layers, no hole: 2(90,267.72)
  silkscreen extent -60,-50 240,400
TP1 [mm]
  round 1 hole 0.7: 1(-0.01,-0.003)
  silkscreen extent -1.01,-1 0.99,0.99
TSSOP20 [mm]
  rect 1.45x0.45 smd: 1(-2.95,2.925) 2(-2.95,2.275) 3(-2.95,1.625) 4(-2.95,0.975) 5(-2.95,0.325) 6(-2.95,-0.325) 7(-2.95,-0.975) 8(-2.95,-1.625) 9(-2.95,-2.275) 10(-2.95,-2.925) 11(2.95,-2.925) 12(2.95,-2.275) 13(2.95,-1.625) 14(2.95,-0.975) 15(2.95,-0.325) 16(2.95,0.325) 17(2.95,0.975) 18(2.95,1.625) 19(2.95,2.275) 20(2.95,2.925)
  silkscreen extent -3.57,-3.3 1.85,3.82
VH3.96-2 [mm]
  rect 2.2x2.2 hole 1.5: 1(0,0)
  round 2.5 hole 1.5: 2(3.96,0)
  silkscreen extent -2.5,-5.02 6.46,3.1
VR3296 [mm] "Potentiometer; 3 Leads"
  rect 1.2x1.2 hole 0.7: 1(0,0)
  round 1.2 hole 0.7: 2(-5.08,0) 3(-2.54,0)
  silkscreen extent -7.62,-2.54 3.81,2.54
XH2.5-2P [mm]
  oval 1.27x1.5 hole 1.016: 1(0,0) 2(2.5,0)
  silkscreen extent -2.56,-3.5 4.94,2.2
XH2.5-3P [mm]
  oval 1.27x2 hole 1.016: 1(0,0) 2(2.5,0) 3(5,0)
  silkscreen extent -2.52,-3.5 7.58,2.2
XH2.5-4P [mm]
  oval 1.27x1.5 hole 1.016: 1(0,0) 2(2.5,0) 3(5,0) 4(7.5,0)
  silkscreen extent -2.48,-3.5 10.12,2.2
XH2.5-5P [mm]
  oval 1.27x1.5 hole 1.016: 1(0,0) 2(2.5,0) 3(5,0) 4(7.5,0) 5(10,0)
  silkscreen extent -2.52,-3.5 12.7,2.2

## Part data
AC1 AC2 AC3 AC4 AC5 AC6 D2 HL1 HL2 HL3 HL4 HL5 HL6 HL7 HL8 HL9 HL10 HL11 HL12 HL13 HL14 HL15 HL16 HL17 HL18 HL19 HL20 HL25 HT: library part LED, "Led"
C1 C2 C3 C4 C5 C6 C7 C8 C9 C10 C11 C12 C13 C14 C15 C16 C17 C18 C19 C20 C21 C27 C33 C34 C36 C37 C39 C40 C42 C43 C46 C47 C50 C51 C56 C65 C66 C67 C68 C69 C73 C74 C78 C79 C82 C83 C85 C98 C99 C100 C105 C113 C114 C115: library part CAP, "Capacitor"
C52 C54: library part "CAPACITOR POL", "Capacitor"
CAN: "XH2.54-4P 针座"
CD1 CD2 CD3 CD4 CD5 CD6 CD8 CD9: library part "Capacitor Electrolytic", "Electrolytic Capacitor"
CM1: library part EMIFIL-BNX, "inductor"
CON2: "Header, 4-Pin"
CP1 CP2: library part "CAP 1*4"
D1 D3 D4 D5 D6 D7 D9 D10 D11 D16 D17 D26: library part DIODE, "Diode"
D8: "Led"
ESD1 TVS1 TVS2 TVS3 TVS4: library part TVS-2, "Diode"
F1: "KF2510-2.54-3P 针座"
FB1 L8 L11: library part INDUCTOR, "Inductor"
FB2 FB3 FB5 FB6: library part "Ferrite Bead", "Ferrite Bead"
GND1 GND2 GND3: library part GND_Point
J1 J4: "XH2.54-2P 针座"
J2: library part XH2.54-5P, "XH2.5-5P 针座"
J3 P1: "PHD-20针座"
J6: "Header, 5-Pin, Dual row"
J8,DNI J9: "XH2.54-3P 针座"
Mark1 Mark2: library part MARK
P2: library part "Header 13X2", "Header, 13-Pin, Dual row"
POW: library part VH-2, "VH3.96 2P 插座"
Q1 Q2 Q3 Q4 Q5: library part NMOS-9945, "N-Channel Power MOSFET"
R1 R3 R9 R12 R13 R19 R24 R33 R36 R37: library part Resistor, "R"
R2 R5 R6 R32 R34 R38 R43 R44 R52 R54: library part "Res Semi", "Semiconductor Resistor"
R4 R7 R8 R10 R11 R15 R16 R17 R18 R20 R27 R35 R39 R40 R41 R42 R45 R46 R47 R48 R49 R50 R51 R53 R55 R56 R57 R58 R59 R60 R61 R62 R63 R64 R65 R66 R67 R68 R90: library part Res2, "Resistor"
R14 R21 R22 R23 R25 R26 R28 R29 RP1 RP2: library part "RES 1*4"
R30 R31: library part RES1, "Resistor"
TP1 TP2 TP3 TP4 TP5 TP6: "Connector"
TVS5: library part TVS
U1 U25: library part L78XX, "L78XX系列芯片"
U2: library part LM339
U3: library part "Op Amp_1ch", "FET Operational Amplifier"
U4: "STM32 ARM-based 32-bit MCU with 128 Kbytes Flash, 64-pin LQFP, Industrial Temperature"
U5: library part LM1117-33
U8 U10: library part ULN2803
U9 U12 U13 U16 U21: library part 74HC245
U11 U19: library part "Op Amp_Instrumentation", "仪表放大器"
U18: "电压参考"
U26: library part L79XX, "L79XX系列芯片"
VR3: library part POT1B, "Potentiometer"
Y2: library part CRYSTAL, "Crystal"

## Free pads (board coordinates)
  round 125.98 hole 137.8: 0(157.48,354.33)
  round 50 hole 25: 0(3244,2893)
  round 118.11 hole 137.8: 1(4566.93,354.33) 2(4566.93,4763.78) 3(157.48,4763.78)

## Via types
v1: diameter 30, hole 16, Top Layer to Bottom Layer, 429 vias
v2: diameter 30, hole 16, Top Layer to Bottom Layer, tented both sides, 137 vias
v3: diameter 40, hole 24, Top Layer to Bottom Layer, 27 vias
v4: diameter 40, hole 24, Top Layer to Bottom Layer, tented both sides, 22 vias
v5: diameter 40, hole 20, Top Layer to Bottom Layer, 6 vias
v6: diameter 30, hole 15, Top Layer to Bottom Layer, tented both sides, 6 vias
v7: diameter 50, hole 24, Top Layer to Bottom Layer, tented both sides, 5 vias
v8: diameter 40, hole 20, Top Layer to Bottom Layer, tented both sides, 4 vias
v9: diameter 50, hole 24, Top Layer to Bottom Layer, 3 vias

## Nets (pads, with @x,y where several pads share a name; then routed paths per layer and width w, separated by ;. In a path a pad name is that pad's centre, name@x,y a point inside that pad or via, vN(x,y) a via of type N, cw(c..) or ccw(c..) an arc to the next point about the centre after c; other vN are vias at no path point)
A+5V: C8.1 C18.1 C34.2 C73.1 C100.1 P1.18 P1.20 PTC1.2 R11.2 R19.1 R20.2 R27.2 R35.2 R37.2 R39.1 R40.2 R45.2 R48.1 R61.1 R65.2 R66.2 U2.3 U3.7 U11.7 U18.1 U19.7 | length 6820.4
  Top Layer w15: C73.1@3636.35,907.49 C73.1@3636.35,913.87 ; C73.1@3642.73,907.49 3651.79,898.43
  Top Layer w20: v2(2983.69,1742.97) R35.2@2983.69,1786.4 ; v2@3066.37,1743 R27.2@3066.37,1786.4 ; v2(3149,1743) R20.2@3149.05,1786.4 ; v2@3231.72,1743 R11.2@3231.72,1786.4 ; R40.2@3444,1857.4 v2(3444,1907.14) ; C8.1@3624.09,1289.12 3661.5,1289.12 3695.75,1323.37 U3.7@3740.24,1323.37 ; v7@3628.03,1234 C8.1@3628.03,1285.18 ; v7(3628.48,852.37) C73.1@3628.48,907.49 ; R65.2@3648.2,1694.79 v2(3648.2,1742.03) R66.2@3648.2,1789.28 ; v2(3744.66,1490) R48.1@3744.66,1527.47 ; U18.1@3803.15,217.22 U18.1@3807.09,213.28 ; v2(3932.45,1790.46) U2.3@4047.8,1790.46 C18.1@4158.83,1790.46 ; R61.1@3986,2232.4 v2@3986,2282 ; v2(4203.32,1547.15) R45.2@4203.32,1600.3 ; v2(4278.12,1429.04) R19.1@4343.08,1429.04 ; v2(4278.12,1547.15) R37.2@4278.12,1600.3 R37.2@4285.99,1600.3 ; R39.1@4341.11,1712.51 R39.1@4343.08,1712.51 v2(4400.17,1712.51)
  Top Layer w25: 3627.95,469.19 3627.95,240.84 3655.51,213.28 U18.1@3807.09,213.28 ; v7(3628.36,435.4) C100.1@3628.36,498.39 3628.36,539.73 3644.9,556.27 3686.24,556.27 3701.19,556.27 U19.7@3736.35,556.27
  Top Layer w30: C73.1@3645.41,898.43 3651.79,898.43 U11.7@3736.35,898.43
  Bottom Layer w20: 3744.66,1539.84 3750,1545.18
  Bottom Layer w30: 3444,1742.03 v2(3444,1907.14) ; v2(3744.66,1490) 3744.66,1539.84 ; 3931.66,1547.15 3931.66,2062.1 3987,2117.44 v2(3987,2283) ; v2(4278.12,1429.04) v2@4278.12,1545.18
  Bottom Layer w40: v2@2982,1743 v2(3066,1743) v2(3149,1743) v2(3232,1743) ; v1(3153.37,815.4) v2(3222,815.4) 3626.47,815.4 ; 3205,1742.03 3444,1742.03 3629.92,1742.03 ; v7@3627.95,1219.19 3627.95,923 3628.36,922.59 v7@3628.36,852.37 ; v7(3628.36,435.4) 3628.36,781 3628.36,815.4 ; 3628.36,817.29 3628.36,815.4 ; v7(3628.48,852.37) v7@3628.36,852.37 ; v7@3629.92,1244.09 3629.92,1742.03 ; v2@3647.23,1743 v2(3648.2,1742.03) 3629.92,1742.03 ; 3648.2,1545.18 3750,1545.18 v2@4276.15,1545.18 ; v2@4278.12,1545.18 4343.08,1545.18 4400.17,1602.27 v2(4400.17,1712.51) 4400.17,1933.17 4523.62,2056.62 P1.20@4523.62,2110.24 P1.18@4523.62,2188.98 ; 3628.36,815.4 v7@3628.36,852.37
  other v1: 3188,815.4
  other v7: 3630,1234
A-5V: C5.1 C14.1 FB2.2 R24.1 U3.4 | length 2510.9
  Top Layer w20: v7@3721.6,1048.4 R24.1@3721.6,1110 ; v7@3842.6,1423.37 U3.4@3952.83,1423.37 C14.1@4061.97,1423.37
  Bottom Layer w40: v1(2856,215.43) v1(2893,215.43) v1(2932,215.43) 3654.43,215.43 3720.47,281.47 3720.47,953.44 ; v7@3720.47,1068.41 3720.47,1222 ; 3720.47,1158.17 3720.47,1222 ; 3720.88,919.65 v7@3720.88,1068.41 ; v7(3842.6,1422.98) 3759.92,1422.98 3720.47,1383.53 3720.47,1222
  other v7: 3722,1048
AC_CTR2: J6.1 RP2.4 U21.15 | length 2054.7
  Top Layer w10: RP2.4@1106.75,3858.5 1106.75,3754.25 1156,3705 v1(1466,3705) 2149,3705 2193.9,3660.1 U21.15@2193.9,3537.4
  Bottom Layer w10: J6.1@1377.71,4370.08 1377.71,4306.29 1466,4218 v1(1466,3705)
AC_CTR19: RP2.6 U21.16 | length 1357.9
  Top Layer w10: RP2.6@1075.25,3858.5 1075.25,3736.75 1133,3679 2130,3679 2168.31,3640.69 U21.16@2168.31,3537.4
AC_CTR20: RP1.4 U21.12 | length 1160
  Top Layer w10: RP1.4@1377.75,3859.5 1377.75,3808.25 1403,3783 2202,3783 2270.67,3714.33 U21.12@2270.67,3537.4
AC_CTR31: J6.3 RP2.2 U21.14 | length 2028.3
  Top Layer w10: RP2.2@1142.18,3858.5 1142.18,3771.82 1183,3731 2167,3731 2219.49,3678.51 U21.14@2219.49,3537.4
  Bottom Layer w10: J6.3@1277.71,4370.08 1277.71,4316.29 1390,4204 v1(1390,3732)
AC_CTR32: J6.5 RP1.6 U21.13 | length 1806.8
  Top Layer w10: RP1.6@1346.25,3859.5 v1(1346.25,3796.75) 1385,3758 2186,3758 2245.08,3698.92 U21.13@2245.08,3537.4
  Bottom Layer w10: J6.5@1177.71,4370.08 1346.25,4201.54 v1(1346.25,3796.75)
AC_CTR33: J6.4 RP1.2 U21.11 | length 1873.5
  Top Layer w10: RP1.2@1413.18,3859.5 1413.18,3826.82 v1(1431,3809) 2218,3809 2296.26,3730.74 U21.11@2296.26,3537.4
  Bottom Layer w10: J6.4@1277.71,4470.08 1329,4418.79 1329,4312 1431,4210 v1(1431,3809)
ADD5: C2.1 C3.1 FB3.1 TP1.1 U25.3 | length 506.3
  Top Layer w30: U25.3@2409.55,849.03 2505.68,849.03 2509.07,845.64 ; 2460.07,847.49 2462.47,845.09 ; 2470.03,845.64 2509.07,845.64 ; TP1.1@2667.61,773.65 2671.43,777.46 2671.43,845.64 ; FB3.1@2798.45,845.64 2671.43,845.64 ; 2509.07,845.64 2671.43,845.64
ADD-5: C6.1 C10.1 FB2.1 TP2.1 U26.3 | length 62.5
  Top Layer w20: 2754.23,322.1 TP2.1@2754.23,384.57
BATH_SIN+: P1.16 R42.2 | length 543.1
  Top Layer w15: R42.2@4339.14,1881.8 4400.17,1881.8 4433.63,1915.26 4433.63,2254.63 4446.72,2267.72 P1.16@4523.62,2267.72
BATH_SIN-: C20.1 P1.15 R47.1 | length 511.8
  Top Layer w15: C20.1@4252.53,2110.14 R47.1@4339.14,2110.14 4343,2114 4396,2167 4396,2276.81 4426,2306.81 4562.19,2306.81 4601.28,2267.72 P1.15@4602.36,2267.72
CAN_5V: C36.2 CAN.1 U6.8 | length 423.2
  Top Layer w15: CAN.1@338.34,4440.94 CAN.1@350.15,4452.76
  Top Layer w20: CAN.1@350.15,4452.76 350.15,4333.85 400.6,4283.4 C36.2@400.6,4216 400.6,4186.4 438,4149 438,4085.7 U6.8@440.19,4083.51
CANG: C36.1 CAN.2 ESD1.3 U6.5 | length 983.8
  Top Layer w15: CAN.2@448.58,4452.76 CAN.2@449.14,4452.2
  Top Layer w20: CAN.2@448.58,4452.76 448.58,4332.42 475.4,4305.6 C36.1@475.4,4216 490,4201.4 490,4013 513,3990 611,3990 727,3990 740.19,4003.19 U6.5@740.19,4083.51 ; 593.6,3990 ESD1.3@593.6,4170.57
CANH: CAN.3 ESD1.2 U6.7 | length 474.1
  Top Layer w15: U6.7@540.19,4083.51 540.19,4177.95
  Top Layer w20: U6.7@540.19,4083.51 540.19,4207.19 556.2,4223.2 ESD1.2@556.2,4269 556.2,4359.8 547,4369 CAN.3@547,4452.76
CANL: CAN.4 ESD1.1 U6.6 | length 469.4
  Top Layer w15: U6.6@640.19,4083.51 640.19,4173.91
  Top Layer w20: U6.6@640.19,4083.51 640.19,4218.81 631,4228 ESD1.1@631,4269 631,4358 645.43,4372.43 CAN.4@645.43,4452.76
DCM_CTR1: Q3.4 U4.61 | length 1690.8
  Top Layer w10: U4.61@2797.75,2455 2797.75,2409.25 2857,2350 3629,2350 3678,2399 3678,2910.28 3714.33,2946.61 Q3.4@3871.67,2946.61
DCM_CTR2: Q3.2 U4.62 | length 1726.2
  Top Layer w10: U4.62@2817.44,2455 2817.44,2418.56 2863,2373 3603,2373 3653,2423 3653,2999.46 3700.16,3046.61 Q3.2@3871.67,3046.61
GND_IN: CM1.PSG POW.1 TVS5.A | length 494.6
  Top Layer w80: 1078.15,824.85 1145.67,757.33 1145.67,358.27
HEAT_OUT: J6.7 U21.17 | length 1777.1
  Top Layer w10: v1(1311,3653) 2115,3653 2142.72,3625.28 U21.17@2142.72,3537.4
  Bottom Layer w10: J6.7@1077.71,4370.08 1172.79,4275 1228,4275 1311,4192 v1(1311,3653)
HEAT_PIN: U4.42 U21.2 U21.3 | length 1071.9
  Top Layer w10: U21.2@2091.54,3305.12 2091.54,3252.95 ; U21.3@2117.13,3305.12 2117.13,3258.86 2111.22,3252.95 2091.54,3252.95 ; U4.42@2472.95,2661.69 2249.31,2661.69 2039.37,2871.63 2039.37,3238.37 2053.95,3252.95 2091.54,3252.95
IO1: CP2.2 D8.K R28.1 R63.2 TP4.1 TVS2.2 U2.2 | length 1977.9
  Top Layer w10: R28.1@3295.5,2024.82 v1(3358,2024.82) ; D8.K@3358,1856.43 v1(3358,2024.82) ; CP2.2@3397.5,2024.82 v1(3358,2024.82) ; v1(3556,2025.21) 3805.39,2025.21 R63.2@3856.86,2076.68 3856.86,2121.86 3887,2152 3887,2285 3913.13,2311.13 TVS2.2@4276.65,2311.13 ; TP4.1@4158.59,2225.88 4158.59,2308.72
  Top Layer w15: R63.2@3856.86,2076.68 3898.2,2035.34 3898.2,1773.53 3931.27,1740.46 U2.2@4047.8,1740.46
  Bottom Layer w10: v1(3358,2024.82) v1@3555.61,2024.82
IO2: CP2.4 P1.14 R28.3 TVS2.1 | length 1548.5
  Top Layer w10: R28.3@3295.5,2060.25 v1(3335,2060.25) CP2.4@3397.5,2060.25 ; v1(3533,2060.65) 3753.65,2060.65 3859,2166 3859,2349 3895.93,2385.93 TVS2.1@4276.65,2385.93
  Top Layer w20: TVS2.1@4276.65,2385.93 4454.07,2385.93 4493.54,2346.46 P1.14@4523.62,2346.46
  Bottom Layer w10: v1(3335,2060.25) v1@3532.61,2060.25
IO3: CP2.6 P1.12 R28.5 TVS1.2 | length 1564
  Top Layer w10: R28.5@3295.5,2091.75 v1(3358,2091.75) CP2.6@3397.5,2091.75 ; v1(3556,2092.14) 3734.14,2092.14 3833,2191 3833,2423 3862.86,2452.86 TVS1.2@4276.65,2452.86
  Top Layer w20: TVS1.2@4276.65,2452.86 4443.44,2452.86 4471.1,2425.2 P1.12@4523.62,2425.2
  Bottom Layer w10: v1(3358,2091.75) v1@3555.61,2091.75
IO4: CP2.8 P1.10 R28.7 TVS1.1 | length 1633.9
  Top Layer w10: R28.7@3295.5,2127.18 v1(3335,2127.18) CP2.8@3397.5,2127.18 ; v1(3533,2127.57) 3715.57,2127.57 3805,2217 3805,2504 3828.66,2527.66 TVS1.1@4276.65,2527.66
  Top Layer w20: TVS1.1@4276.65,2527.66 4447.38,2527.66 4471.1,2503.94 P1.10@4523.62,2503.94
  Bottom Layer w10: v1(3335,2127.18) v1@3532.61,2127.18
IO5: CP1.2 P1.8 R29.1 TVS3.2 | length 1642
  Top Layer w10: R29.1@3295.53,2171.24 v1(3358,2171.24) CP1.2@3398.5,2171.24 ; v1(3556,2171.64) 3705.64,2171.64 3778,2244 3778,2569 3807.53,2598.53 TVS3.2@4276.65,2598.53
  Top Layer w20: TVS3.2@4276.65,2598.53 4455.25,2598.53 4471.1,2582.68 P1.8@4523.62,2582.68
  Bottom Layer w10: v1(3358,2171.24) v1@3555.61,2171.24
IO6: CP1.4 P1.6 R29.3 TVS3.1 | length 1697.8
  Top Layer w10: R29.3@3295.53,2206.68 v1(3335,2206.68) CP1.4@3398.5,2206.68 ; v1(3533,2207.07) 3692.07,2207.07 3753,2268 3753,2624 3802.33,2673.33 TVS3.1@4276.65,2673.33
  Top Layer w20: TVS3.1@4276.65,2673.33 4447.57,2673.33 4459.48,2661.42 P1.6@4523.62,2661.42
  Bottom Layer w10: v1(3335,2206.68) v1@3532.61,2206.68
IO7: CP1.6 P1.4 R29.5 TVS4.2 | length 1709.3
  Top Layer w10: R29.5@3295.53,2238.17 v1(3358,2238.17) CP1.6@3397.13,2238.17 ; v1(3556,2238.57) 3669.57,2238.57 3728,2297 3728,2692 3780.2,2744.2 TVS4.2@4276.65,2744.2
  Top Layer w20: TVS4.2@4276.65,2744.2 4519.58,2744.2 P1.4@4523.62,2740.16
  Bottom Layer w10: v1(3358,2238.17) v1@3555.61,2238.17
IO8: CP1.8 P1.2 R29.7 TVS4.1 | length 1773.2
  Top Layer w10: R29.7@3295.53,2273.61 v1(3335,2273.61) CP1.8@3397.13,2273.61 ; v1(3533,2274) 3659,2274 3703,2318 3703,2758 3764,2819 TVS4.1@4276.65,2819
  Top Layer w20: TVS4.1@4276.65,2819 P1.2@4523.52,2819
  Bottom Layer w10: v1(3335,2273.61) v1@3532.61,2273.61
NetAC1_A: AC1.A RP2.3 | length 164.9
  Top Layer w10: RP2.3@1106.75,3921.5 1106.75,3995.75 1128,4017 AC1.A@1128,4077.57
NetAC2_A: AC2.A RP2.5 | length 169.4
  Top Layer w10: AC2.A@1043,4077.57 1043,4037 1075.25,4004.75 RP2.5@1075.25,3921.5
NetAC3_A: AC3.A RP2.7 | length 191
  Top Layer w10: AC3.A@958,4078.57 958,4041 1039.82,3959.18 RP2.7@1039.82,3921.5
NetAC4_A: AC4.A RP1.1 | length 173.9
  Top Layer w10: RP1.1@1413.18,3922.5 1413.18,3976.18 1466,4029 AC4.A@1466,4074.57
NetAC5_A: AC5.A RP1.3 | length 152.1
  Top Layer w10: RP1.3@1377.75,3922.5 AC5.A@1377.75,4071.31 ; AC5.A@1381,4071.31 AC5.A@1381,4074.57
NetAC6_A: AC6.A RP1.5 | length 173.5
  Top Layer w10: AC6.A@1297,4075.57 1297,4019 1346.25,3969.75 RP1.5@1346.25,3922.5
NetC19_1: C19.1 R41.2 R42.1 TP3.1 U2.6 | length 391.2
  Top Layer w15: U2.6@4047.8,1940.46 4104.5,1940.46 4120.64,1956.6 C19.1@4161.98,1956.6 ; C19.1@4161.98,1952.66 C19.1@4161.98,1956.6 ; TP3.1@4161.98,2045.88 C19.1@4161.98,1956.6 ; R42.1@4339.14,1956.6 R41.2@4252.53,1956.6 C19.1@4161.98,1956.6
NetC21_1: C21.1 R48.2 R55.1 R60.1 | length 258.7
  Top Layer w15: R60.1@3654.1,1602.27 R48.2@3744.66,1602.27 ; R48.2@3732.84,1602.27 R48.2@3744.66,1602.27 ; R55.1@3813.55,1600.3 3811.58,1602.27 R48.2@3744.66,1602.27 ; C21.1@3829.3,1513.69 R55.1@3829.3,1600.3
NetC27_1: C27.1 U30.1 | length 115
  Top Layer w20: C27.1@964.76,1881.13 U30.1@964.76,1996.17
NetC27_2: C27.2 D26.K L11.1 U30.8 | length 684.7
  Top Layer w30: U30.8@760.03,1990.13 736.41,1966.51 736.41,1826.44 767.91,1794.94 1108.66,1794.94 L11.1@1197.67,1883.95
NetC39_2: C39.2 U4.5 Y2.2 | length 556.5
  Top Layer w10: U4.5@2945.39,2622.32 3054.85,2622.32 ; C39.2@3324.02,2504.72 Y2.2@3192.91,2504.72 3107.09,2504.72 ; 3054.85,2622.32 cw(c3054.85,2590.55) 3086.61,2590.55 ; 3054.85,2622.32 cw(c3054.85,2590.55) 3086.61,2590.55 ; 3086.61,2523.62 ccw(c3106.3,2523.62) 3106.3,2503.94 cw(c3107.09,2503.94) 3107.09,2504.72 ; 3086.61,2523.62 ccw(c3105.51,2523.62) 3105.51,2504.72 3107.09,2504.72 ; 3086.61,2523.62 3086.61,2590.55
NetC40_2: C40.2 U4.6 Y2.1 | length 430.4
  Top Layer w10: U4.6@2945.39,2642 3067.2,2642 ccw(c3067.2,2661.42) 3086.61,2661.42 3086.61,2669.29 cw(c3122.05,2669.29) 3122.05,2704.72 Y2.1@3192.91,2704.72 C40.2@3336.61,2704.72
NetC66_1: C66.1 U22.3 | length 172.4
  Top Layer w20: U22.3@994.61,1444.43 1078,1444.43 ; 1100.03,1444.43 1078,1444.43 ; C66.1@1145.03,1444.43 1078,1444.43
NetC98_1: C98.1 C99.2 R17.1 R18.2 U30.4 | length 235.7
  Top Layer w20: R18.2@967.95,2228.95 C99.2@967.95,2318.95 ; 992.46,2228.95 R17.1@1048.15,2228.95 ; R17.1@1056.02,2228.95 C98.1@1056.02,2318.95
NetD2_A: D2.A R15.2 | length 82.2
  Top Layer w10: R15.2@683.8,350 D2.A@765.97,350
NetD8_A: D8.A R40.1 | length 83
  Top Layer w10: D8.A@3358,1785.57 R40.1@3441.03,1785.57
NetD9_K: D9.K L8.2 U22.2
NetD16_A: D16.A J1.2 Q3.5 Q3.6 | length 491.5
  Bottom Layer w20: v1(4138,2970) 4138,3008 4149.69,3019.69 J1.2@4586.61,3019.69
NetD17_A: D17.A J4.2 Q3.7 Q3.8 | length 692.8
  Bottom Layer w20: v1(4139,3062) 4458,3062 4510,3114 4510,3323 4545.27,3358.27 J4.2@4586.61,3358.27
NetFB3_2: FB3.2 PTC1.1
NetFB6_2: FB6.2 PTC2.1
NetHL1_A: HL1.A R23.8 | length 129.4
  Top Layer w10: R23.8@3555.12,4748.03 3555.12,4775.59 3608.32,4828.8 HL1.A@3608.32,4855.4
NetHL2_A: HL2.A R25.2 | length 168.5
  Top Layer w10: HL2.A@3712.09,4846.46 3712.09,4812.91 3729,4796 3791,4796 3803.15,4783.85 R25.2@3803.15,4751.97
NetHL3_A: HL3.A R25.4 | length 109.4
  Top Layer w10: HL3.A@3802.65,4846.46 3802.65,4819.35 3838.58,4783.42 R25.4@3838.58,4751.97
NetHL4_A: HL4.A R14.2 | length 233.2
  Top Layer w10: 2112.26,4820.81 HL4.A@2112.26,4847.52 2112.26,4797.19 2161.42,4748.03 R14.2@2248.03,4748.03
NetHL5_A: HL5.A R14.4 | length 145.8
  Top Layer w10: HL5.A@2210.68,4847.52 2210.68,4824.75 2236.22,4799.21 2263.78,4799.21 2283.46,4779.53 R14.4@2283.46,4748.03
NetHL6_A: HL6.A R14.6 | length 100.3
  Top Layer w10: HL6.A@2313.05,4847.52 2314.96,4845.61 R14.6@2314.96,4748.03
NetHL7_A: HL7.A R14.8 | length 124.8
  Top Layer w10: R14.8@2350.39,4748.03 2350.39,4783.36 2411.47,4844.43 HL7.A@2411.47,4847.52
NetHL8_A: HL8.A R21.2 | length 216.6
  Top Layer w10: HL8.A@2513.83,4847.52 2513.83,4793.25 2543.31,4763.78 2559.06,4748.03 R21.2@2657.48,4748.03
NetHL9_A: HL9.A R21.4 | length 135.7
  Top Layer w10: HL9.A@2612.26,4847.52 2664.51,4795.28 2669.29,4795.28 2692.91,4771.65 R21.4@2692.91,4748.03
NetHL10_A: HL10.A R21.6 | length 103.5
  Top Layer w10: HL10.A@2714.62,4847.52 2724.41,4837.73 R21.6@2724.41,4748.03
NetHL11_A: HL11.A R21.8 | length 132.5
  Top Layer w10: R21.8@2759.84,4748.03 2759.84,4759.84 2813.05,4813.05 HL11.A@2813.05,4847.52 HL11.A@2813.05,4836.56
NetHL12_A: HL12.A R22.2 | length 220.3
  Top Layer w10: HL12.A@2915.41,4847.52 2915.41,4773.57 2940.95,4748.03 R22.2@3051.18,4748.03
NetHL13_A: HL13.A R22.4 | length 129.6
  Top Layer w10: HL13.A@3013.83,4847.52 3013.83,4840.5 3086.61,4767.72 R22.4@3086.61,4748.03
NetHL14_A: HL14.A R22.6 | length 100.3
  Top Layer w10: HL14.A@3116.19,4847.52 3118.11,4845.61 R22.6@3118.11,4748.03
NetHL15_A: HL15.A R22.8 | length 124.8
  Top Layer w10: R22.8@3153.54,4748.03 3153.54,4763.78 3214.62,4824.86 HL15.A@3214.62,4847.52
NetHL16_A: HL16.A R23.2 | length 218
  Top Layer w10: HL16.A@3316.98,4847.52 3316.98,4777.51 3346.46,4748.03 R23.2@3452.76,4748.03
NetHL17_A: HL17.A R23.4 | length 129.6
  Top Layer w10: HL17.A@3415.41,4847.52 3415.41,4844.44 3488.19,4771.65 R23.4@3488.19,4748.03
NetHL18_A: HL18.A R23.6 | length 101.9
  Top Layer w10: HL18.A@3513.83,4847.52 3519.69,4841.67 R23.6@3519.69,4748.03
NetHL19_A: HL19.A R25.6 | length 104.1
  Top Layer w10: R25.6@3870.08,4751.97 3870.08,4787 3893.2,4810.12 HL19.A@3893.2,4846.46
NetHL20_A: HL20.A R25.8 | length 163.2
  Top Layer w10: R25.8@3905.51,4751.97 3905.51,4779.51 3919,4793 3973.6,4793 3991.62,4811.02 HL20.A@3991.62,4847.52
NetHL25_A: HL25.A R49.1 | length 91.4
  Top Layer w15: HL25.A@2005.74,2735.17 R49.1@2094.32,2735.17 ; R49.1@2110.07,2735.17 R49.1@2112.04,2733.2
NetHT_A: HT.A RP2.1 | length 184.4
  Top Layer w10: RP2.1@1142.18,3921.5 1142.18,3962.18 1213,4033 HT.A@1213,4076.57
NetJ2_5: J2.5 R5.1 | length 455.8
  Top Layer w20: R5.1@4225.46,1335.24 4274.22,1384 4532,1384 4582.55,1434.55 J2.5@4582.55,1492.13
NetP1_19: P1.19 R37.1 | length 687.9
  Top Layer w15: R37.1@4352.92,1600.3 4396,1600.3 ; 4421.82,1600.3 4396,1600.3 ; P1.19@4602.36,2110.24 4602.36,1998.36 4462,1858 4462,1626 4436.3,1600.3 4396,1600.3
NetR2_1: R2.1 U11.8 | length 53.2
  Top Layer w15: R2.1@3736.35,795.27 U11.8@3736.35,848.43
NetR2_2: R2.2 U11.1 | length 206.1
  Top Layer w15: R2.2@3807.4,771 3807.4,826.4 3829.43,848.43 U11.1@3948.95,848.43
NetR4_2: R4.2 U3.2 U3.6 | length 347.1
  Top Layer w12: R4.2@3626.46,1373.37 U3.6@3740.24,1373.37 3817.4,1373.37 3867.4,1323.37 U3.2@3952.83,1323.37
NetR5_2: R5.2 R6.1 U3.3 | length 209.3
  Top Layer w20: U3.3@3952.83,1373.37 4000.63,1373.37 4033,1341 R6.1@4070,1341 ; R6.1@4071.97,1339.03 R5.2@4150.71,1339.03
NetR30_2: R30.2 R34.2 R38.1 U11.2 | length 448.4
  Top Layer w12: R38.1@4043.72,870.44 R38.1@4067.34,870.44
  Top Layer w20: U11.2@3948.95,898.43 4015.72,898.43 R38.1@4043.72,870.44 ; R38.1@4067.34,870.44 R34.2@4157.89,870.44 4254.35,870.44 4276,848.79 R30.2@4276,748
NetR31_2: R31.2 R52.2 R54.1 U19.2 | length 367.8
  Top Layer w12: U19.2@3948.95,556.27 3997.65,556.27
  Top Layer w20: U19.2@3948.95,556.27 4001.59,556.27 4013.8,544.06 R52.2@4165.76,544.06 ; R52.2@4165.76,539.73 R31.2@4263,539.73
NetR39_2: R39.2 R41.1 | length 174.5
  Top Layer w15: R41.1@4260.4,1881.8 R41.1@4252.53,1881.8 4252.53,1848.33 4269.26,1831.6 4328.32,1831.6 4343.08,1816.84 R39.2@4343.08,1787.31
NetR43_1: R43.1 U19.8 | length 144.9
  Top Layer w20: U19.8@3736.35,506.27 3736.35,435.68 3754.82,417.21 R43.1@3803.01,417.21
NetR43_2: R43.2 U19.1 | length 155.7
  Top Layer w20: R43.2@3876.39,407.84 R43.2@3876.39,417.21 ; R43.2@3877.81,417.21 3877.81,482.67 3901.41,506.27 U19.1@3948.95,506.27
NetR45_1: R45.1 R46.1 R56.2 U2.1 | length 367.1
  Top Layer w15: R56.2@4047.8,1610.14 U2.1@4047.8,1690.46 ; R56.2@4053.71,1600.3 4132.45,1600.3 4132.45,1645.58 4154.1,1667.23 4232.84,1667.23 4252.53,1686.92 R46.1@4252.53,1712.51
NetR46_2: R46.2 U2.4 | length 226.7
  Top Layer w15: U2.4@4047.8,1840.46 4199.38,1840.46 R46.2@4252.53,1787.31
NetR53_2: R53.2 U19.6 | length 110.5
  Top Layer w15: R53.2@3628.48,612.57 3634.78,606.27 U19.6@3736.35,606.27
NetR55_2: R55.2 R56.1 U2.7 | length 525.6
  Top Layer w15: R55.2@3904.1,1600.3 R56.1@3978.91,1600.3 v2(3978.91,1657.39) ; v2(3993.08,1990.46) U2.7@4047.8,1990.46
  Bottom Layer w15: v2(3978.91,1657.39) 3978.91,1806.99 3993.08,1821.17 v2(3993.08,1990.46)
NetR57_1: R57.1 U22.1 U22.7 U22.8
NetR58_1: R58.1 R59.2 U22.5 | length 213.4
  Top Layer w20: U22.5@782.02,1494.43 822.43,1494.43 837.4,1509.4 R58.1@837.4,1586 R59.2@912.6,1586
NetR61_2: R61.2 R62.1 R64.1 | length 204.6
  Top Layer w15: R61.2@3986,2157.6 4072,2157.6 4081.27,2148.33 R62.1@4081.27,2076.68 4081.27,2110.5
NetR62_2: R62.2 R63.1 U2.5 | length 410
  Top Layer w15: R63.1@3923.79,2076.68 R63.1@3931.66,2076.68 ; 3931.66,2039.28 R63.1@3931.66,2076.68 ; R62.2@3998.59,2084.55 R62.2@3998.59,2076.68 ; R62.2@4006.47,2076.68 R62.2@3998.59,2076.68 ; U2.5@4047.8,1890.46 3966.31,1890.46 3931.66,1925.1 R63.1@3931.66,2076.68 ; R63.1@3931.66,2076.68 R62.2@3998.59,2076.68
NetR65_1: R65.1 U2.14 | length 114
  Top Layer w15: R65.1@3723,1694.79 3727.33,1690.46 U2.14@3835.21,1690.46
NetR66_1: R66.1 U2.13 | length 132.4
  Top Layer w15: R66.1@3723,1789.28 3771.82,1740.46 U2.13@3835.21,1740.46
NetR67_1: R67.1 U2.8 | length 117.3
  Top Layer w15: R67.1@3723,1978.25 3735.21,1990.46 U2.8@3835.21,1990.46
NetR68_1: R68.1 U2.10 | length 118.9
  Top Layer w15: R68.1@3716.31,1890.46 U2.10@3835.21,1890.46
NetR90_2: R90.2 U11.6 | length 129.5
  Top Layer w12: R90.2@3641.35,1007.49 3636.35,1002.49 3690.41,948.43 U11.6@3736.35,948.43
NetRP2_8: RP2.8 U21.18 | length 1326.3
  Top Layer w10: RP2.8@1039.82,3858.5 1039.82,3730.18 1146,3624 2100.13,3624 2117.13,3607 U21.18@2117.13,3537.4
NetU8_4: U8.4 U12.15 | length 207.5
  Top Layer w10: U12.15@3120.41,3537.4 3120.41,3619.23 3136.41,3635.23 3150.79,3649.61 U8.4@3150.79,3732.28
NetU8_5: U8.5 U12.14 | length 217.6
  Top Layer w10: U12.14@3146,3537.4 3146,3608 3200.79,3662.79 U8.5@3200.79,3732.28